# Altium PCB V_FB.PcbDoc
Units mm, origin at the board's own origin, x right, y up, seen from the top; angles counter-clockwise.
Board outline 109.22 x 71.12 mm, 2 copper layers (Top Layer, Bottom Layer); 19 components, 16 nets, 54 pads, 0 vias.
Unrouted connection lines stored in the file: 32.
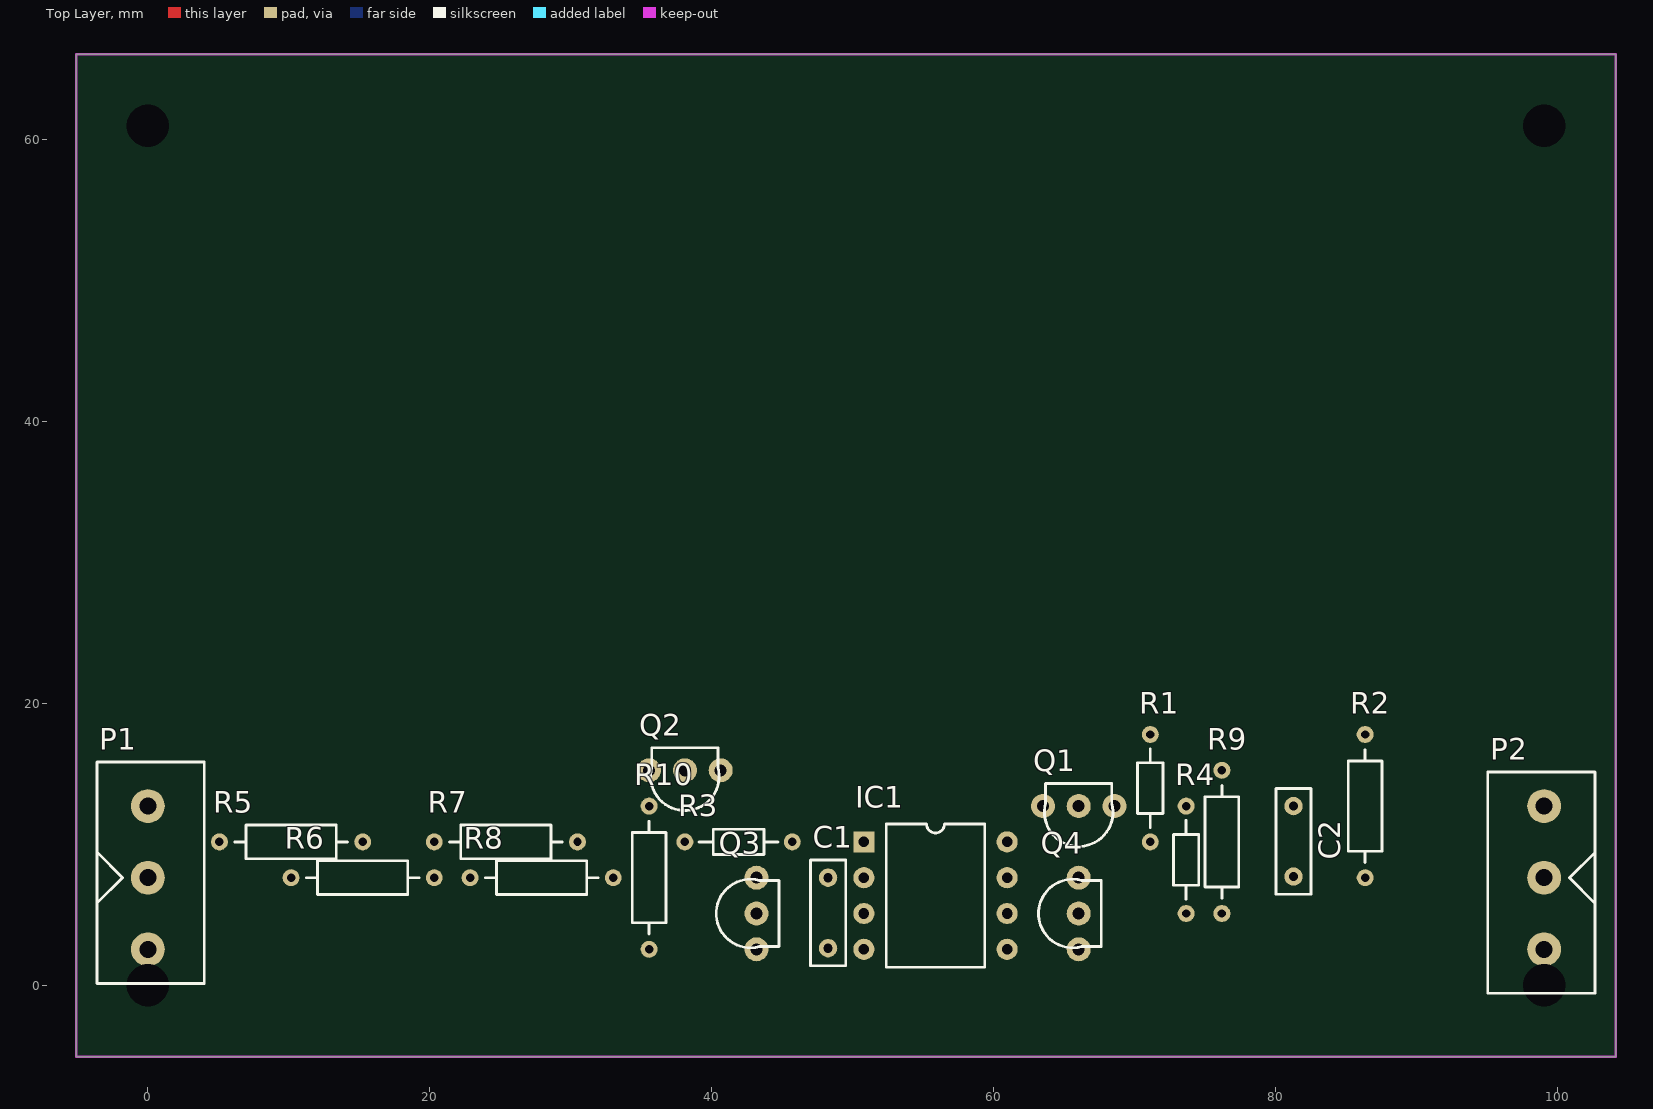
[diagram p0: Top Layer view]
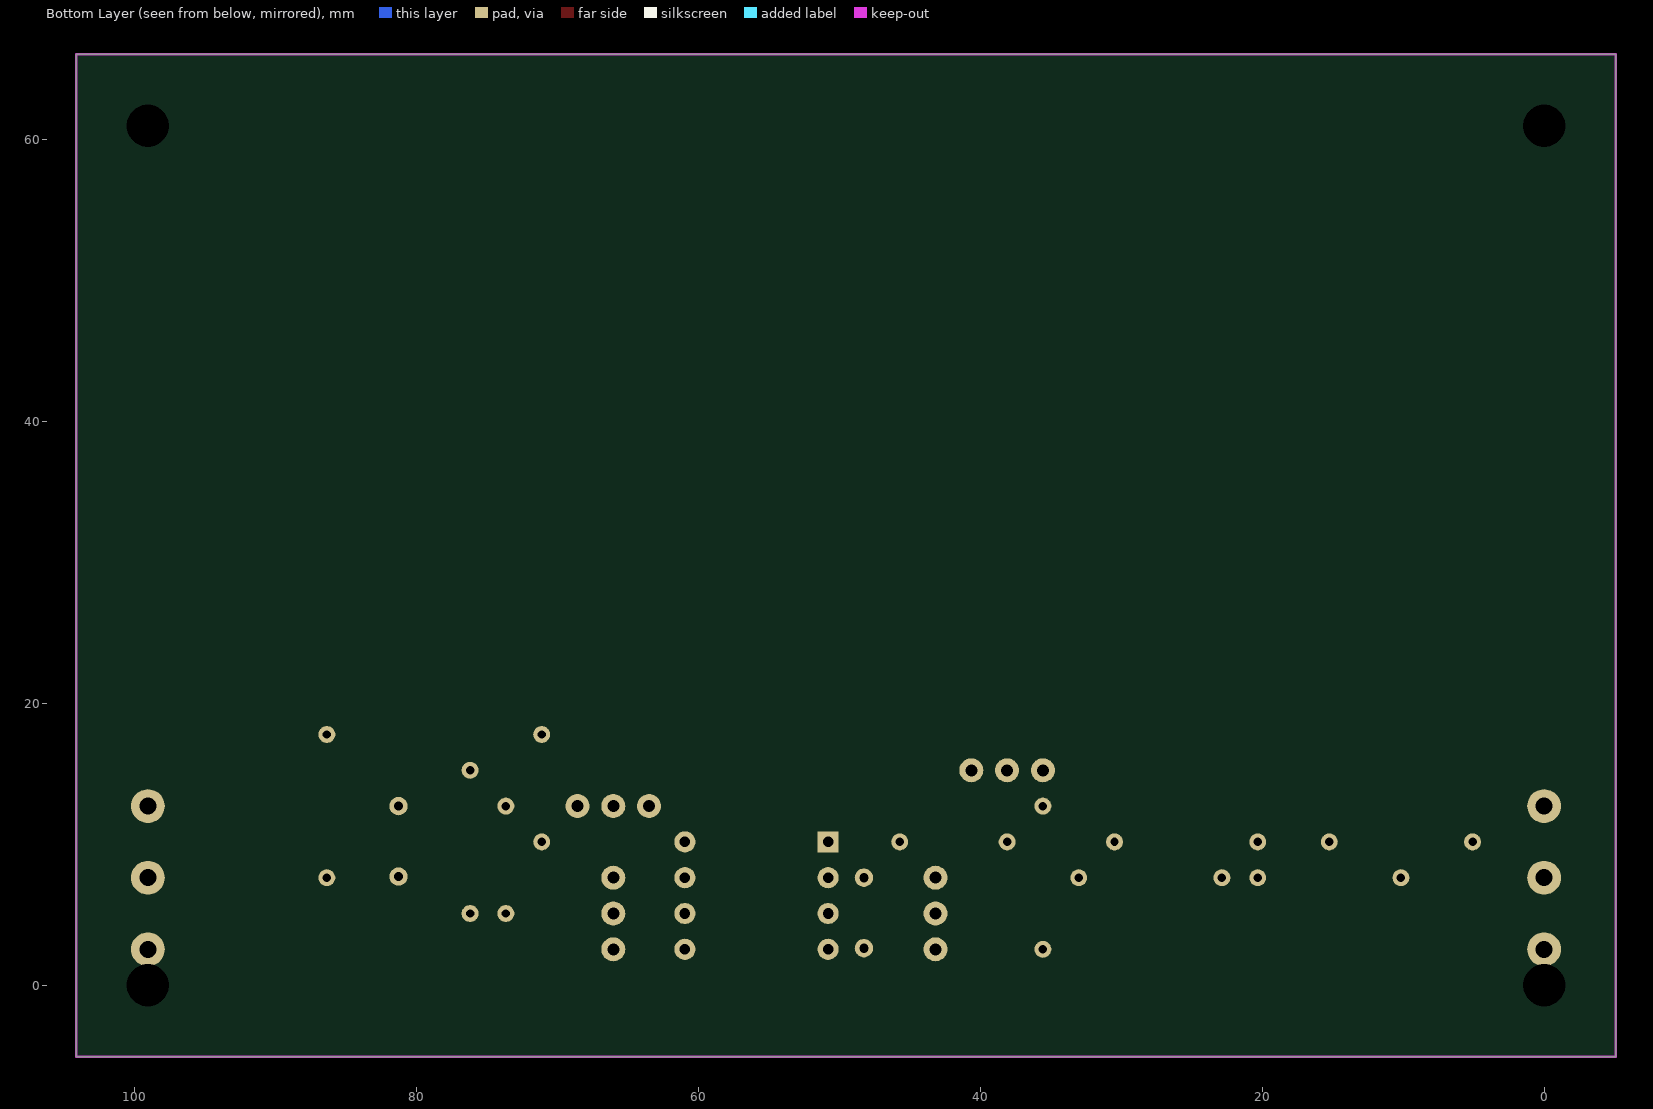
[diagram p1: Bottom Layer view, seen from below]

## Layer stack, top to bottom
Top Solder: solder mask 0.0102, Solder Resist, Dk 3.5
Top Layer: signal copper 0.0356
Dielectric 1: dielectric 0.32, FR-4, Dk 4.8
Bottom Layer: signal copper 0.0356
Bottom Solder: solder mask 0.0102, Solder Resist, Dk 3.5

## Board outline
-5.08,-5.08 104.14,-5.08 104.14,66.04 -5.08,66.04

## Design rules (kind name [scope] priority, off if disabled: settings)
Clearance [All] p1: gap=0.254 ignorepadtopadclearanceinfootprint=FALSE
PolygonConnect [All] p1: connectstyle=Relief reliefconductorwidth=0.254 reliefentries=4 polygonreliefangle="90 Angle" airgapwidth=0.254
RoutingVias [All] p1: holewidth=0.711 width=1.27 viastyle="Through Hole" minholewidth=0.711 minwidth=1.27 maxholewidth=0.711 maxwidth=1.27
SolderMaskExpansion [All] p1: expansion=0.102 istentingtop=FALSE
SupplyNets "Schematic Supply Nets_3" [InNet('+5_POWER')] p1: voltage=0.000
SupplyNets "Schematic Supply Nets_2" [InNet('POWER_GND')] p2: voltage=0.000
SupplyNets "Schematic Supply Nets_1" [InNet('DIGITAL_GND')] p3: voltage=0.000
SupplyNets "Schematic Supply Nets" [InNet('+5_DIGITAL')] p4: voltage=0.000
Width [All] p1: maxlimit=0.254 minlimit=0.254 preferedwidth=0.254
30 further rules are at their usual default settings.

## Components (designator, comment, footprint, x,y, rotation, side; value= is the part's Value field where it differs from the comment)
C1 "100nF/100V/MKT/5mm" "mkt 5mm" 48.26,5.12 r90 top
C2 "100nF/100V/MKT/5mm" "mkt 5mm" 81.28,10.2 r90 top
IC1 "HCNR201" HCNR201_DIP8 55.88,6.35 r0 top
P1 "kf301/3pin" kf301/3pin 0,7.62 r270 top
P2 "kf301/3pin" kf301/3pin 99.06,7.62 r90 top
Q1 "BC237B/TO-92" TO-92 66.04,12.7 r180 top
Q2 "BC237B/TO-92" TO-92 38.1,15.24 r180 top
Q3 "BC307A/TO-92" TO-92 43.18,5.08 r90 top
Q4 "BC307A/TO-92" TO-92 66.04,5.08 r90 top
R1 "10k/0.125W/Axial0.3" "Axial 0.3" 71.12,13.97 r270 top
R2 "470R/0.25W/Axial0.4" "Axial 0.4" 86.36,12.7 r270 top
R3 "10k/0.125W/Axial0.3" "Axial 0.3" 41.91,10.16 r180 top
R4 "62k/0.125W/Axial0.3" "Axial 0.3" 73.66,8.89 r90 top
R5 "2M/0.5W/Axial0.4" "Axial 0.4" 10.16,10.16 r0 top
R6 "2M/0.5W/Axial0.4" "Axial 0.4" 15.24,7.62 r0 top
R7 "2M/0.5W/Axial0.4" "Axial 0.4" 25.4,10.16 r0 top
R8 "2M/0.5W/Axial0.4" "Axial 0.4" 27.94,7.62 r0 top
R9 "10R/0.25W/Axial0.4" "Axial 0.4" 76.2,10.16 r270 top
R10 "10R/0.25W/Axial0.4" "Axial 0.4" 35.56,7.62 r270 top

## Footprints (in the part's own frame and the unit in brackets; to place one, negate y for a bottom-side part, rotate by r counter-clockwise, add the part's x,y. Pads: shape width x height; smd on the part's side, far side on the other; paste and mask are expansions set on the pad)
"Axial 0.3" [mm]
  round 1.2 hole 0.6: 1(-3.81,0) 2(3.81,0)
  silkscreen extent -2.8,-0.9 2.8,0.9, body extent -4.07,-1.04 4.07,1.04, height 2.05
"Axial 0.4" [mm]
  round 1.2 hole 0.6: 1(-5.08,0) 2(5.08,0)
  silkscreen extent -4,-1.2 4,1.2, body extent -5.38,-1.19 5.38,1.19, height 2.41
HCNR201_DIP8 [mm]
  rect 1.5x1.5 hole 0.75: 1(-5.08,3.81)
  round 1.5 hole 0.75: 2(-5.08,1.27) 3(-5.08,-1.27) 4(-5.08,-3.81) 5(5.08,-3.81) 6(5.08,-1.27) 7(5.08,1.27) 8(5.08,3.81)
  silkscreen extent -3.5,-5.08 3.5,5.08, body extent -3.94,-5.46 3.94,5.46, height 5.08
kf301/3pin [mm]
  round 2.4 hole 1.2: 1(-5.08,0) 2(0,0) 3(5.08,0)
  silkscreen extent -8.2,-3.6 7.5,4, body extent -8.1,-3.6 7.5,4, height 10
"mkt 5mm" [mm]
  round 1.3 hole 0.65: 1(-2.5,0) 2(2.5,0)
  silkscreen extent -3.75,-1.25 3.75,1.25, body extent -3.6,-1.25 3.6,1.25, height 6.51
TO-92 [mm]
  round 1.7 hole 0.85: 1(-2.54,0) 2(0,0) 3(2.54,0)
  silkscreen extent -2.43,-1.6 2.43,2.85, body extent -2.77,-1.37 2.77,2.5, height 8.5

## Part data
C1 C2: library part Capacitor, "Capacitor"
IC1: "isolate linear optocoupler"
P1 P2: "RELAY", LatestRevisionDate=17-Jul-2002, LatestRevisionNote="Re-released for DXP Platform.", Publisher="Altium Limited"
Q1 Q2: library part BC237B, "npn"
Q3 Q4: library part BC307A, "pnp"
R1 R2 R3 R4 R5 R6 R7 R8 R9 R10: library part Res, "Resistor", LatestRevisionDate=17-Jul-2002, LatestRevisionNote="Re-released for DXP Platform.", PackageDescription="Axial Device, Thru-Hole; 2 Leads; 0.3 in Pin Spacing", PackageReference=AXIAL-0.3, Published=8-Jun-2000, Publisher="Altium Limited", Simulation ModelName=RESISTOR, Simulation PortMap=(1:1),(2:2)

## Free pads (board coordinates)
  round 0 hole 3: 0(0,0) 0(0,60.96) 0(99.06,0) 0(99.06,60.96)

## Nets (pads, with @x,y where several pads share a name; then routed paths per layer and width w, separated by ;. In a path a pad name is that pad's centre, name@x,y a point inside that pad or via, vN(x,y) a via of type N, cw(c..) or ccw(c..) an arc to the next point about the centre after c; other vN are vias at no path point)
+5_DIGITAL: C2.2 P2.3 R1.1 R2.1
+5_POWER: C1.2 IC1.2 P1.1 R3.1
DIGITAL_GND: C2.1 IC1.5 P2.1 Q4.1 R9.2
input_signal: IC1.3 Q3.2 R8.2
NetIC1_1: IC1.1 Q2.1
NetIC1_6: IC1.6 Q4.2 R4.1
NetQ1_2: Q1.2 Q4.3 R1.2
NetQ1_3: Q1.3 R9.1
NetQ2_2: Q2.2 Q3.3 R3.2
NetQ2_3: Q2.3 R10.1
NetR5_2: R5.2 R6.1
NetR6_2: R6.2 R7.1
NetR7_2: R7.2 R8.1
POWER_GND: C1.1 IC1.4 P1.3 Q3.1 R10.2
Vin: P1.2 R5.1
Vout: P2.2 Q1.1 R2.2 R4.2
pads on no net: IC1.7 IC1.8

## Keep-outs
Keep-Out Layer:
  the board outline again, w0.2